# EAGLE board FM radio Xmit (EAGLE 6.4)
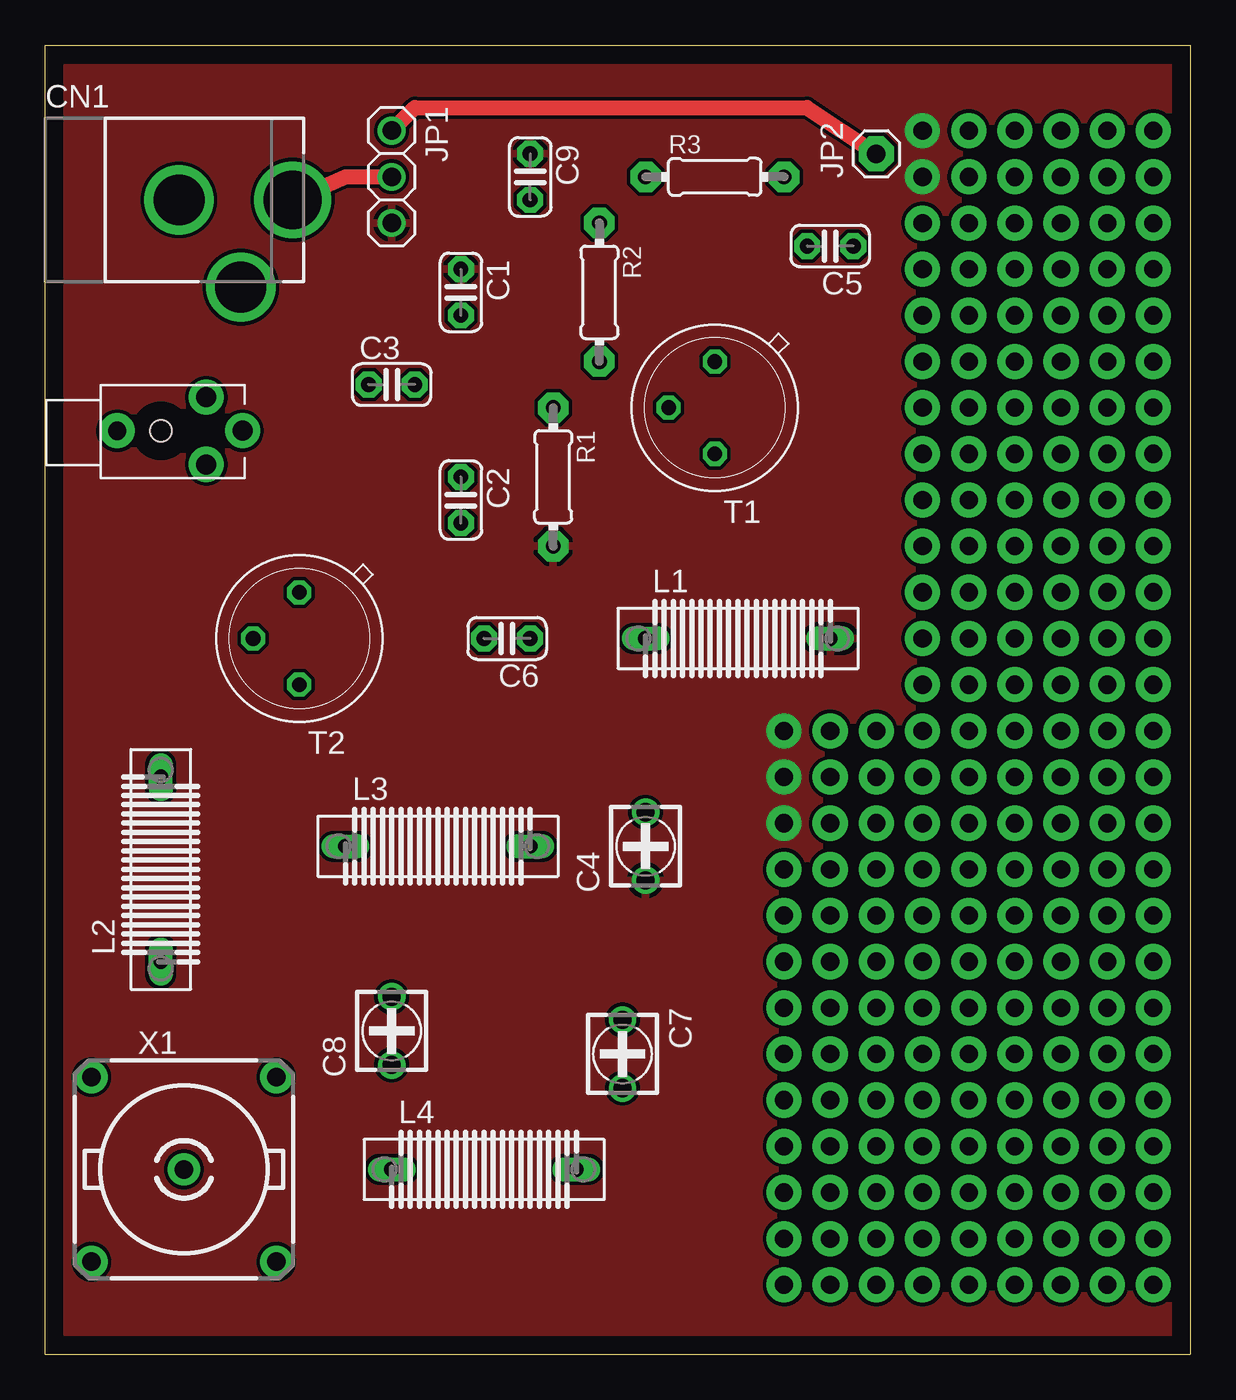
[diagram p0: board, top side]
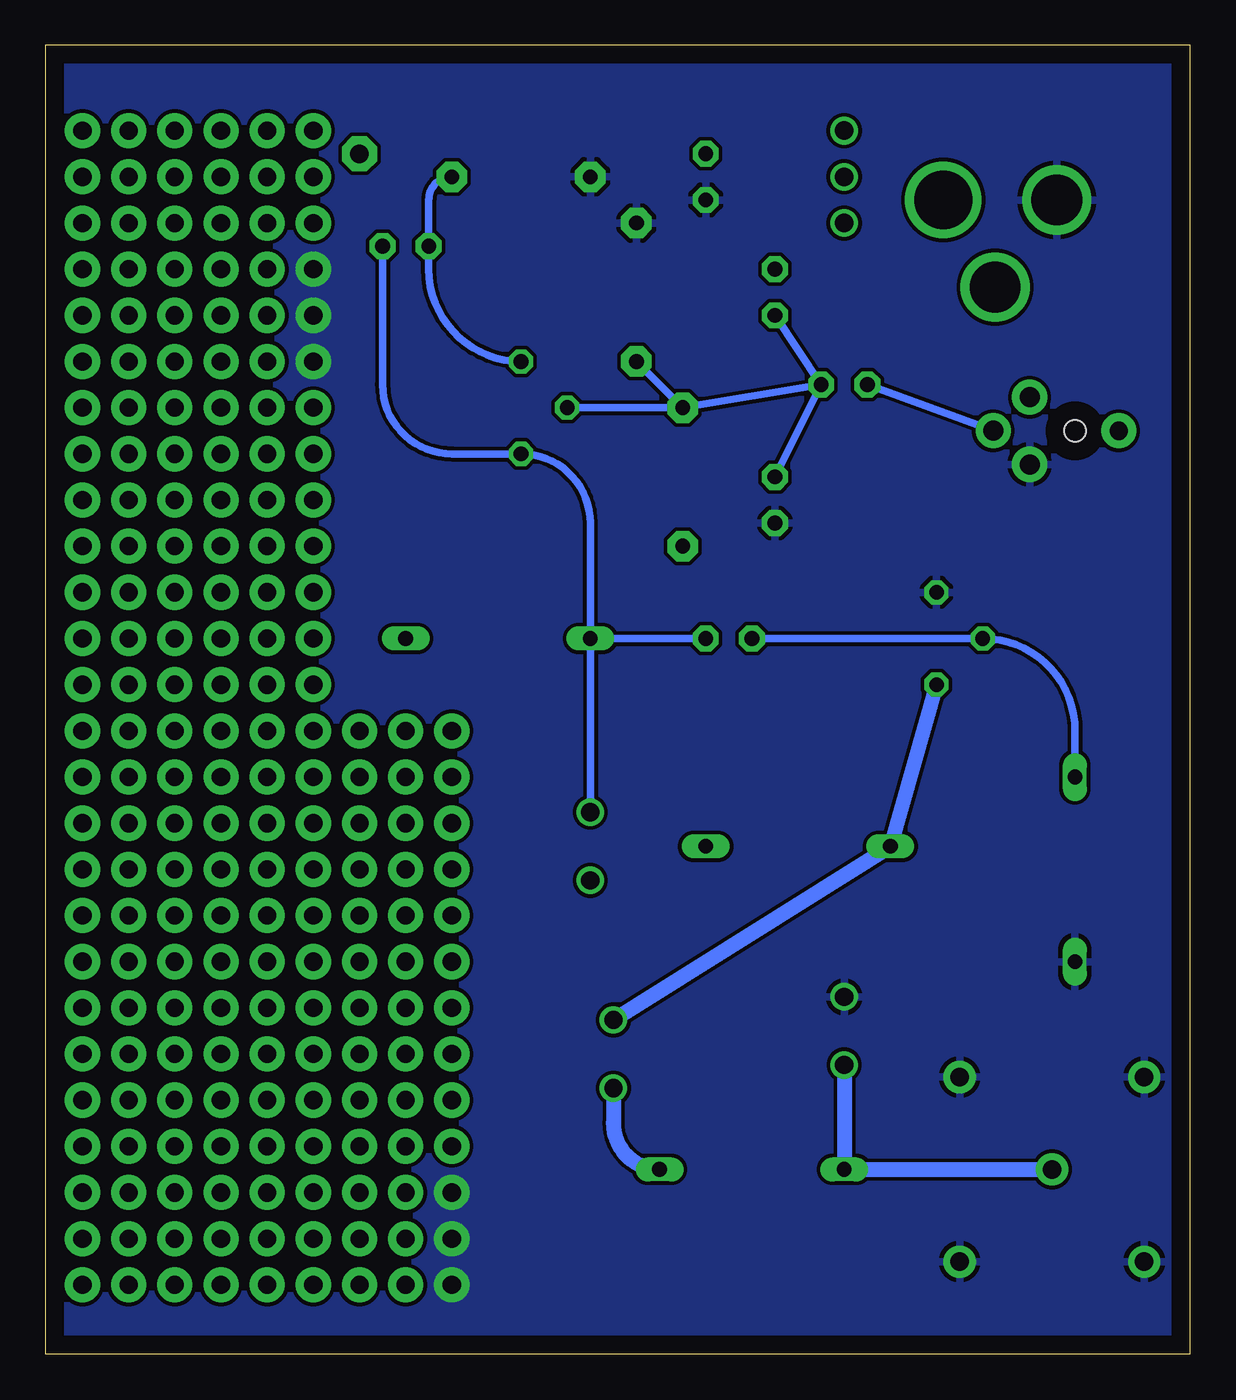
[diagram p1: board, bottom side, seen from below]

Size 63 x 72 mm. Coordinates in mm from the lower left corner, seen from the top.
Outline: 0,0 0,72 63,72 63,0 0,0
Copper layers (1*16): Top 0.035mm / dielectric 1.5mm / Bottom 0.035mm
Design rules "default": minimum track width 10mil, minimum drill 24mil, track to track 8mil, track to pad 8mil, pad to pad 8mil, via to via 8mil, smd to smd 8mil, copper to edge 40mil, drill to drill 8mil, minimum pad ring 10mil, minimum via ring 8mil, stop-mask expansion 4mil, vias tented up to drill 0mil, thermal gap 10mil

## Footprints (pad centres in the part's own frame; a part is rotated, then mirrored left to right if it is on the bottom)
C025-024X044 = drill 0.813 pad 1.422 octagon: 1 -1.27,0; 2 1.27,0
3008 = drill 1: + -1.875,0; - 1.875,0
DCJACK_2MM_PTH = drill 2.8: GND 0,7.35; GNDBREAK 4.8,10.75 | drill 3.2: PWR 0,13.6
1X03 = drill 1.016: 1 -2.54,0; 2 0,0; 3 2.54,0
1X01 = drill 1.016 pad 1.93 octagon: 1 0,0
DS10 = drill 0.813 long: 1 -5.08,0; 2 5.08,0
0204/7 = drill 0.813 pad 1.676 octagon: 1 -3.81,0; 2 3.81,0
TO5 = drill 0.813 octagon: 1 0,-2.54; 2 2.54,0; 3 0,2.54
STEREOJACK2.5MM_STEREOJACK2.5MM = drill 1.1 pad 1.93: RING1 2.5,-1.85; RING2 2.5,1.85; TIP 4.5,0 | drill 1 pad 1.93: SHIELD -2.4,0 | hole 1.2: 0,0
A1944 = drill 1.016 pad 1.778: 1 0,0; 2 5.08,5.08; 3 -5.08,5.08; 4 -5.08,-5.08; 5 5.08,-5.08

## Placement (x,y rotation side)
C1  1nF  [C025-024X044]  22.86,58.42 270 top
C2  1nF  [C025-024X044]  22.86,46.99 270 top
C3  4.7uF/16V  [C025-024X044]  19.05,53.34 0 top
C4  0-45pF  [3008]  33.02,27.94 90 top
C5  10pF  [C025-024X044]  43.18,60.96 180 top
C6  10pF  [C025-024X044]  25.4,39.37 180 top
C7  0-45pF  [3008]  31.75,16.51 270 top
C8  0-45pF  [3008]  19.05,17.78 90 top
C9  100nF  [C025-024X044]  26.67,64.77 270 top
CN1  [DCJACK_2MM_PTH]  0,63.5 270 top
JP1  [1X03]  19.05,64.77 270 top
JP2  [1X01]  45.72,66.04 90 top
L1  DS10  [DS10]  38.1,39.37 0 top
L2  DS10  [DS10]  6.35,26.67 90 top
L3  DS10  [DS10]  21.59,27.94 0 top
L4  DS10  [DS10]  24.13,10.16 0 top
R1  10K  [0204/7]  27.94,48.26 270 top
R2  10K  [0204/7]  30.48,58.42 270 top
R3  470  [0204/7]  36.83,64.77 0 top
T1  2N2219  [TO5]  36.83,52.07 180 top
T2  2N2219  [TO5]  13.97,39.37 180 top
U1  [STEREOJACK2.5MM_STEREOJACK2.5MM]  6.35,50.8 0 top
X1  A1944-50  [A1944]  7.62,10.16 0 top

## Library data of the parts
C1-C3 C5 C6 C9 CN1 JP1 JP2 R1-R3 = adafruit
C4 C7 C8 = c-trimm; OC_FARNELL: unknown; OC_NEWARK: unknown
L1-L4 = inductors
T1 T2 = transistor
U1 = SparkFun-Connectors
X1 = con-coax; OC_FARNELL: unknown; OC_NEWARK: unknown

## Nets
GND: C2.2 C8.- C9.2 CN1.GND L2.1 R2.1 R3.1 T2.1 U1.RING1 X1.2 X1.3 X1.4 X1.5
GNDBREAK: CN1.GNDBREAK
N$1: C1.2 C2.1 C3.2 R1.1 R2.2 T1.2
N$4: C7.+ L3.1 T2.3
N$5: C3.1 U1.TIP
N$7: C5.2 R3.2 T1.1
N$11: C6.2 L2.2 T2.2
N$16: C4.- C5.1 C6.1 L1.1 T1.3
N$21: C7.- L4.2
N$23: C8.+ L4.1 X1.1
N$45: JP1.1 JP2.1
PWR: CN1.PWR JP1.2
VCC: C1.1 C4.+ C9.1 JP1.3 L1.2 R1.2
X: L3.2

## Tracks (layer width: path | path; a pad name or v marks a point on that pad's centre or on a via)
GND  (via drill 1 pad 1.93)
  other vias: 48.26,59.69 48.26,57.15 48.26,54.61 40.64,3.81 40.64,6.35 40.64,8.89
  pour Bottom: -2.54,73.66 66.04,73.66 66.04,-5.08 -2.54,-5.08
N$1
  Bottom 0.406: T1.2 R1.1 | C3.2 C1.2 | C3.2 C2.1 | R1.1 C3.2 | R2.2 R1.1
N$3  (via drill 1 pad 1.93)
  other vias: 50.8,57.15
N$4
  Bottom 0.813: C7.+ L3.1 T2.3
N$5
  Bottom 0.406: U1.TIP C3.1
N$6  (via drill 1 pad 1.93)
  other vias: 53.34,57.15
N$7
  Bottom 0.406: R3.2 arc-90 41.91,63.5 C5.2 41.91,59.69 arc-90 T1.1
N$8  (via drill 1 pad 1.93)
  other vias: 55.88,57.15
N$9  (via drill 1 pad 1.93)
  other vias: 58.42,57.15
N$10  (via drill 1 pad 1.93)
  other vias: 60.96,57.15
N$11
  Bottom 0.406: C6.2 T2.2 arc90 6.35,34.29 L2.2
N$12  (via drill 1 pad 1.93)
  other vias: 60.96,59.69
N$13  (via drill 1 pad 1.93)
  other vias: 58.42,59.69
N$14  (via drill 1 pad 1.93)
  other vias: 58.42,62.23
N$15  (via drill 1 pad 1.93)
  other vias: 60.96,62.23
N$16
  Bottom 0.406: C5.1 44.45,53.34 arc-90 40.64,49.53 T1.3 arc90 33.02,45.72 L1.1 | L1.1 C6.1 | L1.1 C4.-
N$17  (via drill 1 pad 1.93)
  other vias: 60.96,64.77
N$18  (via drill 1 pad 1.93)
  other vias: 60.96,67.31
N$21
  Bottom 0.813: C7.- 31.75,12.7 arc-90 L4.2
N$23
  Bottom 0.813: C8.+ L4.1 X1.1
N$29  (via drill 1 pad 1.93)
  other vias: 48.26,62.23
N$31  (via drill 1 pad 1.93)
  other vias: 50.8,59.69
N$32  (via drill 1 pad 1.93)
  other vias: 53.34,59.69
N$33  (via drill 1 pad 1.93)
  other vias: 55.88,59.69
N$34  (via drill 1 pad 1.93)
  other vias: 55.88,62.23
N$35  (via drill 1 pad 1.93)
  other vias: 55.88,64.77
N$36  (via drill 1 pad 1.93)
  other vias: 55.88,67.31
N$37  (via drill 1 pad 1.93)
  other vias: 58.42,67.31
N$38  (via drill 1 pad 1.93)
  other vias: 58.42,64.77
N$39  (via drill 1 pad 1.93)
  other vias: 53.34,67.31
N$40  (via drill 1 pad 1.93)
  other vias: 50.8,67.31
N$41  (via drill 1 pad 1.93)
  other vias: 50.8,64.77
N$42  (via drill 1 pad 1.93)
  other vias: 53.34,64.77
N$43  (via drill 1 pad 1.93)
  other vias: 53.34,62.23
N$44  (via drill 1 pad 1.93)
  other vias: 50.8,62.23
N$45
  Top 0.813: JP1.1 20.32,68.58 41.91,68.58 JP2.1
N$46  (via drill 1 pad 1.93)
  other vias: 50.8,54.61
N$47  (via drill 1 pad 1.93)
  other vias: 53.34,54.61
N$48  (via drill 1 pad 1.93)
  other vias: 60.96,54.61
N$49  (via drill 1 pad 1.93)
  other vias: 58.42,54.61
N$50  (via drill 1 pad 1.93)
  other vias: 55.88,54.61
N$51  (via drill 1 pad 1.93)
  other vias: 48.26,52.07
N$52  (via drill 1 pad 1.93)
  other vias: 48.26,49.53
N$53  (via drill 1 pad 1.93)
  other vias: 48.26,46.99
N$54  (via drill 1 pad 1.93)
  other vias: 48.26,44.45
N$55  (via drill 1 pad 1.93)
  other vias: 48.26,41.91
N$56  (via drill 1 pad 1.93)
  other vias: 48.26,39.37
N$57  (via drill 1 pad 1.93)
  other vias: 48.26,36.83
N$58  (via drill 1 pad 1.93)
  other vias: 48.26,34.29
N$59  (via drill 1 pad 1.93)
  other vias: 48.26,31.75
N$60  (via drill 1 pad 1.93)
  other vias: 45.72,31.75
N$61  (via drill 1 pad 1.93)
  other vias: 43.18,31.75
N$64  (via drill 1 pad 1.93)
  other vias: 40.64,26.67
N$65  (via drill 1 pad 1.93)
  other vias: 40.64,24.13
N$66  (via drill 1 pad 1.93)
  other vias: 40.64,21.59
N$67  (via drill 1 pad 1.93)
  other vias: 40.64,19.05
N$68  (via drill 1 pad 1.93)
  other vias: 40.64,16.51
N$69  (via drill 1 pad 1.93)
  other vias: 40.64,13.97
N$70  (via drill 1 pad 1.93)
  other vias: 40.64,11.43
N$74  (via drill 1 pad 1.93)
  other vias: 43.18,3.81
N$75  (via drill 1 pad 1.93)
  other vias: 45.72,3.81
N$76  (via drill 1 pad 1.93)
  other vias: 48.26,3.81
N$77  (via drill 1 pad 1.93)
  other vias: 50.8,3.81
N$78  (via drill 1 pad 1.93)
  other vias: 53.34,3.81
N$79  (via drill 1 pad 1.93)
  other vias: 55.88,3.81
N$80  (via drill 1 pad 1.93)
  other vias: 58.42,3.81
N$81  (via drill 1 pad 1.93)
  other vias: 60.96,3.81
N$82  (via drill 1 pad 1.93)
  other vias: 60.96,6.35
N$83  (via drill 1 pad 1.93)
  other vias: 60.96,8.89
N$84  (via drill 1 pad 1.93)
  other vias: 60.96,11.43
N$85  (via drill 1 pad 1.93)
  other vias: 60.96,13.97
N$86  (via drill 1 pad 1.93)
  other vias: 60.96,16.51
N$87  (via drill 1 pad 1.93)
  other vias: 60.96,19.05
N$88  (via drill 1 pad 1.93)
  other vias: 60.96,21.59
N$89  (via drill 1 pad 1.93)
  other vias: 60.96,24.13
N$90  (via drill 1 pad 1.93)
  other vias: 60.96,26.67
N$91  (via drill 1 pad 1.93)
  other vias: 60.96,29.21
N$92  (via drill 1 pad 1.93)
  other vias: 60.96,31.75
N$93  (via drill 1 pad 1.93)
  other vias: 58.42,31.75
N$94  (via drill 1 pad 1.93)
  other vias: 55.88,31.75
N$95  (via drill 1 pad 1.93)
  other vias: 53.34,31.75
N$96  (via drill 1 pad 1.93)
  other vias: 50.8,31.75
N$97  (via drill 1 pad 1.93)
  other vias: 50.8,39.37
N$98  (via drill 1 pad 1.93)
  other vias: 53.34,39.37
N$99  (via drill 1 pad 1.93)
  other vias: 55.88,39.37
N$100  (via drill 1 pad 1.93)
  other vias: 58.42,39.37
N$101  (via drill 1 pad 1.93)
  other vias: 60.96,39.37
N$102  (via drill 1 pad 1.93)
  other vias: 60.96,41.91
N$103  (via drill 1 pad 1.93)
  other vias: 58.42,41.91
N$104  (via drill 1 pad 1.93)
  other vias: 58.42,44.45
N$105  (via drill 1 pad 1.93)
  other vias: 60.96,44.45
N$106  (via drill 1 pad 1.93)
  other vias: 60.96,46.99
N$107  (via drill 1 pad 1.93)
  other vias: 60.96,49.53
N$108  (via drill 1 pad 1.93)
  other vias: 60.96,52.07
N$109  (via drill 1 pad 1.93)
  other vias: 58.42,52.07
N$110  (via drill 1 pad 1.93)
  other vias: 55.88,52.07
N$111  (via drill 1 pad 1.93)
  other vias: 53.34,52.07
N$112  (via drill 1 pad 1.93)
  other vias: 50.8,52.07
N$113  (via drill 1 pad 1.93)
  other vias: 50.8,41.91
N$114  (via drill 1 pad 1.93)
  other vias: 53.34,41.91
N$115  (via drill 1 pad 1.93)
  other vias: 55.88,41.91
N$116  (via drill 1 pad 1.93)
  other vias: 55.88,44.45
N$117  (via drill 1 pad 1.93)
  other vias: 55.88,46.99
N$118  (via drill 1 pad 1.93)
  other vias: 55.88,49.53
N$119  (via drill 1 pad 1.93)
  other vias: 58.42,49.53
N$120  (via drill 1 pad 1.93)
  other vias: 58.42,46.99
N$121  (via drill 1 pad 1.93)
  other vias: 53.34,49.53
N$122  (via drill 1 pad 1.93)
  other vias: 50.8,49.53
N$123  (via drill 1 pad 1.93)
  other vias: 50.8,46.99
N$124  (via drill 1 pad 1.93)
  other vias: 53.34,46.99
N$125  (via drill 1 pad 1.93)
  other vias: 53.34,44.45
N$126  (via drill 1 pad 1.93)
  other vias: 50.8,44.45
N$127  (via drill 1 pad 1.93)
  other vias: 50.8,36.83
N$128  (via drill 1 pad 1.93)
  other vias: 53.34,36.83
N$129  (via drill 1 pad 1.93)
  other vias: 60.96,36.83
N$130  (via drill 1 pad 1.93)
  other vias: 58.42,36.83
N$131  (via drill 1 pad 1.93)
  other vias: 55.88,36.83
N$132  (via drill 1 pad 1.93)
  other vias: 50.8,34.29
N$133  (via drill 1 pad 1.93)
  other vias: 53.34,34.29
N$134  (via drill 1 pad 1.93)
  other vias: 55.88,34.29
N$135  (via drill 1 pad 1.93)
  other vias: 58.42,34.29
N$136  (via drill 1 pad 1.93)
  other vias: 60.96,34.29
N$137  (via drill 1 pad 1.93)
  other vias: 43.18,29.21
N$138  (via drill 1 pad 1.93)
  other vias: 45.72,29.21
N$139  (via drill 1 pad 1.93)
  other vias: 48.26,29.21
N$140  (via drill 1 pad 1.93)
  other vias: 50.8,29.21
N$141  (via drill 1 pad 1.93)
  other vias: 53.34,29.21
N$142  (via drill 1 pad 1.93)
  other vias: 55.88,29.21
N$143  (via drill 1 pad 1.93)
  other vias: 58.42,29.21
N$144  (via drill 1 pad 1.93)
  other vias: 58.42,26.67
N$145  (via drill 1 pad 1.93)
  other vias: 55.88,26.67
N$146  (via drill 1 pad 1.93)
  other vias: 53.34,26.67
N$147  (via drill 1 pad 1.93)
  other vias: 50.8,26.67
N$148  (via drill 1 pad 1.93)
  other vias: 48.26,26.67
N$149  (via drill 1 pad 1.93)
  other vias: 45.72,26.67
N$150  (via drill 1 pad 1.93)
  other vias: 43.18,26.67
N$151  (via drill 1 pad 1.93)
  other vias: 43.18,24.13
N$152  (via drill 1 pad 1.93)
  other vias: 45.72,24.13
N$153  (via drill 1 pad 1.93)
  other vias: 48.26,24.13
N$154  (via drill 1 pad 1.93)
  other vias: 50.8,24.13
N$155  (via drill 1 pad 1.93)
  other vias: 53.34,24.13
N$156  (via drill 1 pad 1.93)
  other vias: 55.88,24.13
N$157  (via drill 1 pad 1.93)
  other vias: 58.42,24.13
N$158  (via drill 1 pad 1.93)
  other vias: 43.18,21.59
N$159  (via drill 1 pad 1.93)
  other vias: 45.72,21.59
N$160  (via drill 1 pad 1.93)
  other vias: 48.26,21.59
N$161  (via drill 1 pad 1.93)
  other vias: 50.8,21.59
N$162  (via drill 1 pad 1.93)
  other vias: 53.34,21.59
N$163  (via drill 1 pad 1.93)
  other vias: 55.88,21.59
N$164  (via drill 1 pad 1.93)
  other vias: 58.42,21.59
N$165  (via drill 1 pad 1.93)
  other vias: 58.42,19.05
N$166  (via drill 1 pad 1.93)
  other vias: 55.88,19.05
N$167  (via drill 1 pad 1.93)
  other vias: 53.34,19.05
N$168  (via drill 1 pad 1.93)
  other vias: 50.8,19.05
N$169  (via drill 1 pad 1.93)
  other vias: 48.26,19.05
N$170  (via drill 1 pad 1.93)
  other vias: 45.72,19.05
N$171  (via drill 1 pad 1.93)
  other vias: 43.18,19.05
N$172  (via drill 1 pad 1.93)
  other vias: 43.18,16.51
N$173  (via drill 1 pad 1.93)
  other vias: 45.72,16.51
N$174  (via drill 1 pad 1.93)
  other vias: 48.26,16.51
N$175  (via drill 1 pad 1.93)
  other vias: 50.8,16.51
N$176  (via drill 1 pad 1.93)
  other vias: 53.34,16.51
N$177  (via drill 1 pad 1.93)
  other vias: 55.88,16.51
N$178  (via drill 1 pad 1.93)
  other vias: 58.42,16.51
N$179  (via drill 1 pad 1.93)
  other vias: 43.18,13.97
N$180  (via drill 1 pad 1.93)
  other vias: 45.72,13.97
N$181  (via drill 1 pad 1.93)
  other vias: 48.26,13.97
N$182  (via drill 1 pad 1.93)
  other vias: 50.8,13.97
N$183  (via drill 1 pad 1.93)
  other vias: 53.34,13.97
N$184  (via drill 1 pad 1.93)
  other vias: 55.88,13.97
N$185  (via drill 1 pad 1.93)
  other vias: 58.42,13.97
N$186  (via drill 1 pad 1.93)
  other vias: 43.18,11.43
N$187  (via drill 1 pad 1.93)
  other vias: 45.72,11.43
N$188  (via drill 1 pad 1.93)
  other vias: 48.26,11.43
N$189  (via drill 1 pad 1.93)
  other vias: 50.8,11.43
N$190  (via drill 1 pad 1.93)
  other vias: 53.34,11.43
N$191  (via drill 1 pad 1.93)
  other vias: 55.88,11.43
N$192  (via drill 1 pad 1.93)
  other vias: 58.42,11.43
N$193  (via drill 1 pad 1.93)
  other vias: 58.42,8.89
N$194  (via drill 1 pad 1.93)
  other vias: 55.88,8.89
N$195  (via drill 1 pad 1.93)
  other vias: 53.34,8.89
N$196  (via drill 1 pad 1.93)
  other vias: 50.8,8.89
N$197  (via drill 1 pad 1.93)
  other vias: 48.26,8.89
N$198  (via drill 1 pad 1.93)
  other vias: 45.72,8.89
N$199  (via drill 1 pad 1.93)
  other vias: 43.18,8.89
N$200  (via drill 1 pad 1.93)
  other vias: 43.18,6.35
N$201  (via drill 1 pad 1.93)
  other vias: 45.72,6.35
N$202  (via drill 1 pad 1.93)
  other vias: 48.26,6.35
N$203  (via drill 1 pad 1.93)
  other vias: 50.8,6.35
N$204  (via drill 1 pad 1.93)
  other vias: 53.34,6.35
N$205  (via drill 1 pad 1.93)
  other vias: 55.88,6.35
N$206  (via drill 1 pad 1.93)
  other vias: 58.42,6.35
N$207  (via drill 1 pad 1.93)
  other vias: 45.72,34.29
N$208  (via drill 1 pad 1.93)
  other vias: 43.18,34.29
PWR
  Top 0.813: CN1.PWR 16.51,64.77 JP1.2
VCC  (via drill 1 pad 1.93)
  other vias: 48.26,67.31 48.26,64.77 40.64,34.29 40.64,31.75 40.64,29.21
  pour Top: -3.81,74.93 69.85,74.93 69.85,-1.27 -3.81,-1.27

## Text on the board
Reference: Board thickness is 1.6 mm | Based on a design by / www.wiringcircuit.com | V1.0 BETA | Race For Resilience - Tokyo / 4W Community FM Radio Transmitter